# EAGLE board gt-jtx-breakout-genius-ms3d (EAGLE 6.3)
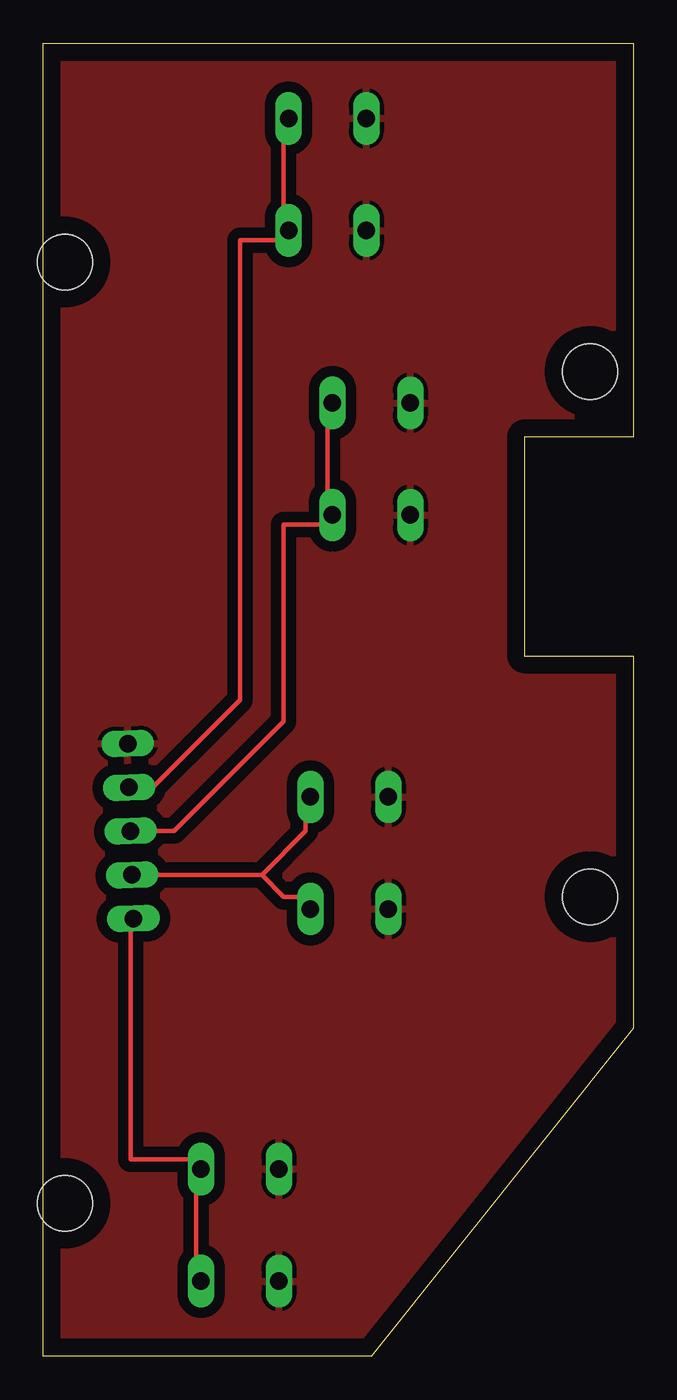
[diagram p0: board, top side]
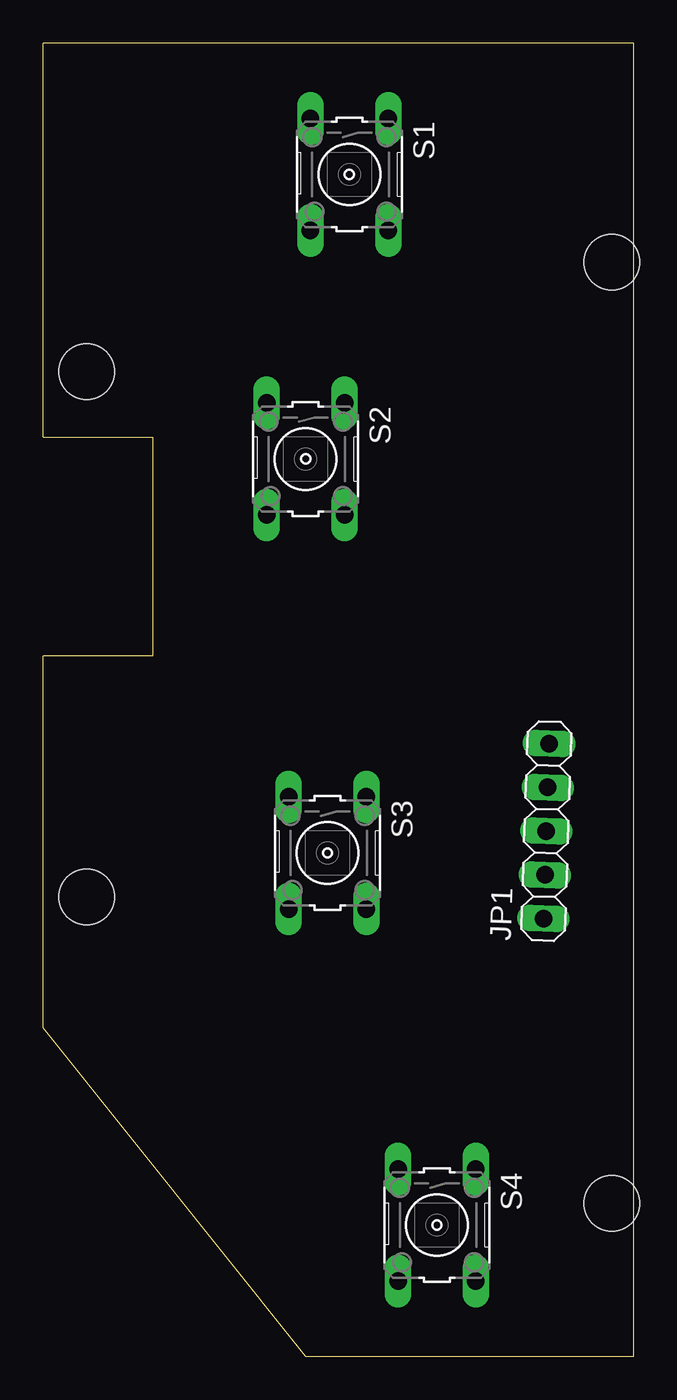
[diagram p1: board, bottom side, seen from below]

Size 34.29 x 76.2 mm. Coordinates in mm from the lower left corner, seen from the top.
Outline: 19.05,0 0,0 0,76.2 34.29,76.2 34.29,53.34 27.94,53.34 27.94,40.64 34.29,40.64 34.29,19.05 19.05,0
Copper layers (1*16): Top 0.035mm / dielectric 1.5mm / Bottom 0.035mm
Design rules "default": minimum track width 10mil, minimum drill 24mil, track to track 8mil, track to pad 8mil, pad to pad 8mil, via to via 8mil, smd to smd 8mil, copper to edge 40mil, drill to drill 8mil, minimum pad ring 10mil, minimum via ring 8mil, stop-mask expansion 4mil, vias tented up to drill 0mil, thermal gap 10mil
Holes 3.2 mm at 1.27,63.5 1.27,8.89 31.75,57.15 31.75,26.67

## Footprints (pad centres in the part's own frame; a part is rotated, then mirrored left to right if it is on the bottom)
1X05 = drill 1.016 long: 1 -5.08,0; 2 -2.54,0; 3 0,0; 4 2.54,0; 5 5.08,0
B3F-10XX = drill 1.016 long: 1 -3.251,2.261; 2 3.251,2.261; 3 -3.251,-2.261; 4 3.251,-2.261

## Placement (x,y rotation side)
JP1  [1X05]  5.08,30.48 88.1 bottom
S1  [B3F-10XX]  16.51,68.58 270 bottom
S2  [B3F-10XX]  19.05,52.07 270 bottom
S3  [B3F-10XX]  17.78,29.21 270 bottom
S4  [B3F-10XX]  11.43,7.62 270 bottom

## Library data of the parts
JP1 = pinhead
S1-S4 = switch-omron; MPN: B3F-1000; OC_FARNELL: 176432; OC_NEWARK: 36M3542

## Nets
GND: JP1.5 S1.3 S1.4 S2.3 S2.4 S3.3 S3.4 S4.3 S4.4
N$2: JP1.2 S3.1 S3.2
N$3: JP1.1 S4.1 S4.2
N$8: JP1.4 S1.1 S1.2
N$9: JP1.3 S2.1 S2.2

## Tracks (layer width: path | path; a pad name or v marks a point on that pad's centre or on a via)
GND
  pour Top (isolate 0.61): -2.54,80.01 36.83,80.01 36.83,78.74 36.83,0 -1.27,0 -2.54,0
N$2
  Top 0.254: 12.7,27.94 6.35,27.94 JP1.2 | 12.7,27.94 13.97,26.67 15.24,26.67 S3.2 | 12.7,27.94 15.24,30.48 15.24,31.75 S3.1
N$3
  Top 0.254: S4.2 8.89,5.08 8.89,10.16 S4.1 8.89,11.43 5.08,11.43 5.08,25.4 JP1.1
N$8
  Top 0.254: JP1.4 5.08,33.02 6.35,33.02 11.43,38.1 11.43,64.77 13.97,64.77 S1.2 13.97,66.04 13.97,71.12 S1.1
N$9
  Top 0.254: JP1.3 7.62,30.48 13.97,36.83 13.97,48.26 16.51,48.26 S2.2 16.51,49.53 16.51,54.61 S2.1